# Altium PCB PCB1.PcbDoc
Units mil, origin at the board's own origin, x right, y up, seen from the top; angles counter-clockwise.
Board outline 5050 x 1500 mil, 2 copper layers (Top Layer, Bottom Layer); 39 components, 29 nets, 96 pads, 0 vias.
Unrouted connection lines stored in the file: 44.
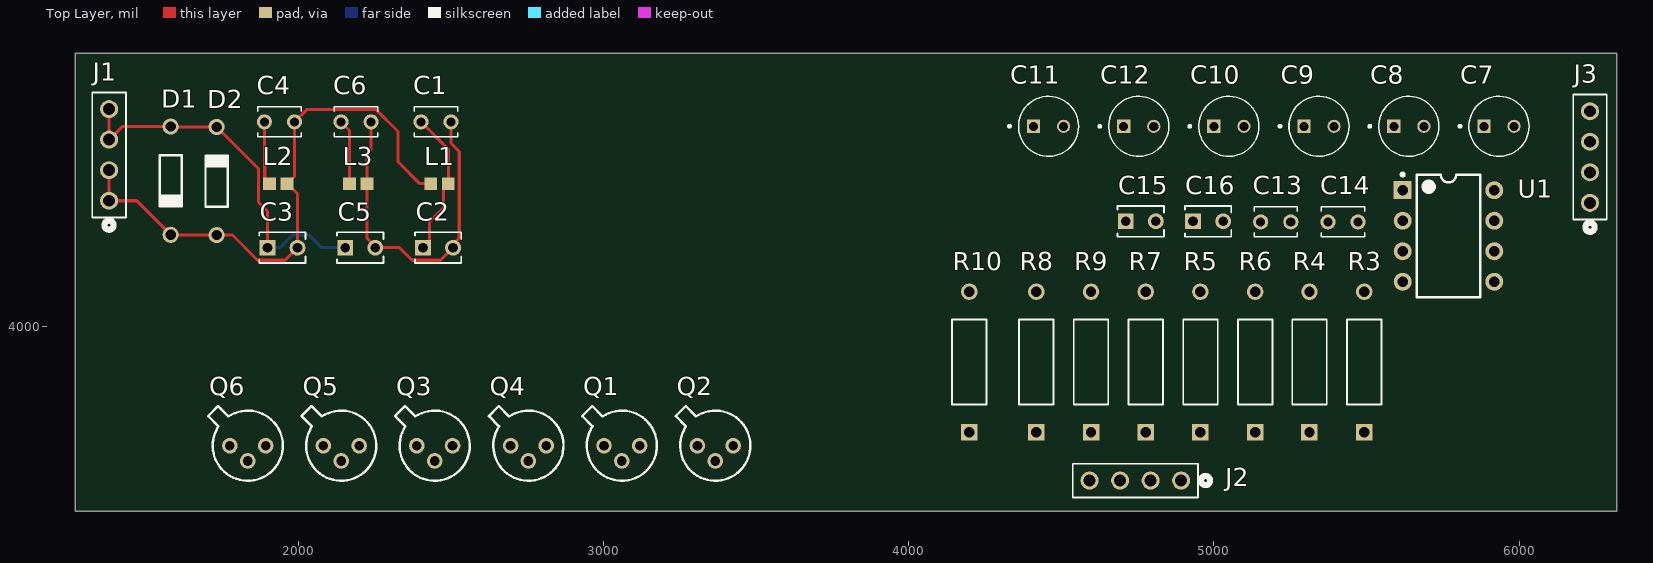
[diagram p0: Top Layer view]
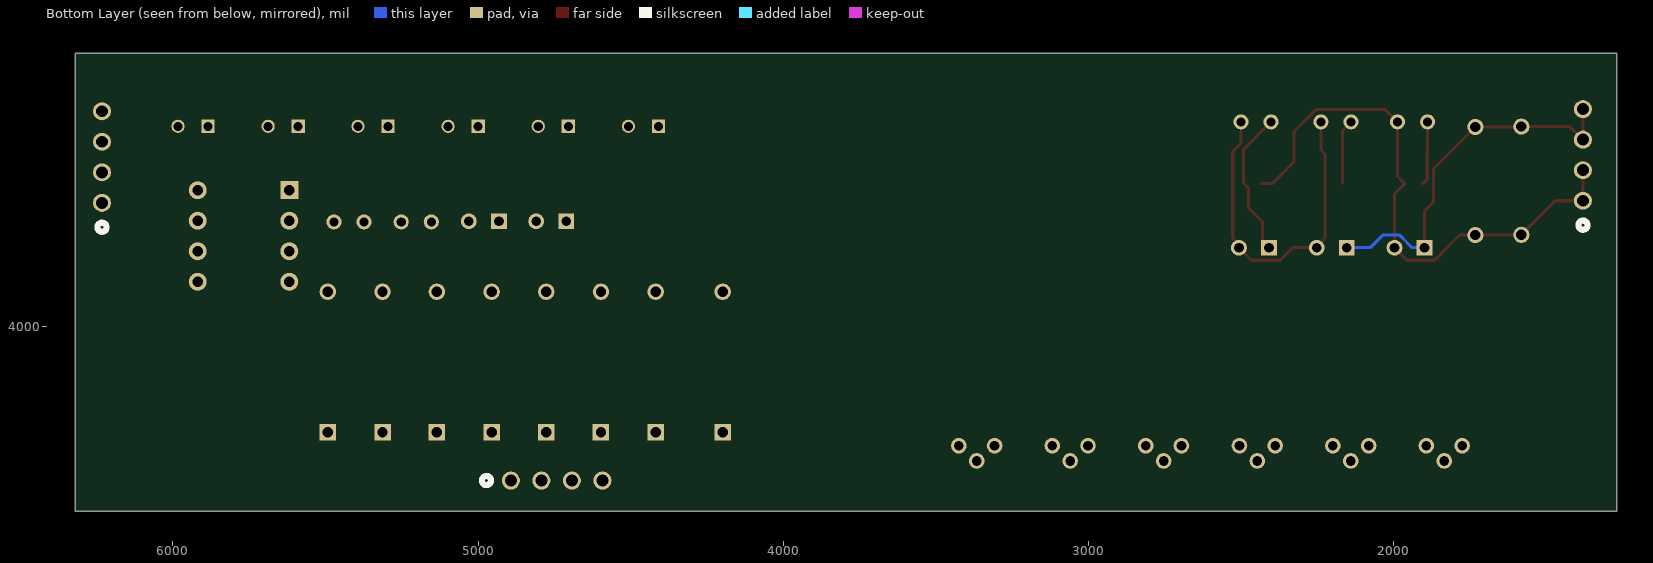
[diagram p1: Bottom Layer view, seen from below]

## Layer stack, top to bottom
Top Solder: solder mask 0.4, Solder Resist, Dk 3.5
Top Layer: signal copper 1.4
Dielectric 1: dielectric 12.6, FR-4, Dk 4.8
Bottom Layer: signal copper 1.4
Bottom Solder: solder mask 0.4, Solder Resist, Dk 3.5

## Board outline
1270,3395 1270,4895 6320,4895 6320,3395

## Design rules (kind name [scope] priority, off if disabled: settings)
Clearance [All] p1: gap=10 ignorepadtopadclearanceinfootprint=FALSE
PolygonConnect [All] p1: connectstyle=Relief reliefconductorwidth=10 reliefentries=4 polygonreliefangle="90 Angle" airgapwidth=10
RoutingVias [All] p1: holewidth=28 width=50 viastyle="Through Hole" minholewidth=28 minwidth=50 maxholewidth=28 maxwidth=50
SolderMaskExpansion [All] p1: expansion=4 istentingtop=FALSE
SupplyNets "Schematic Supply Nets" [InNet('GND')] p1: voltage=0.000
Width [All] p1: maxlimit=10 minlimit=10 preferedwidth=10
30 further rules are at their usual default settings.

## Classes and differential pairs
component class mahirAMPLIFER: C7 C8 C9 C10 C11 C12 C13 C14 C15 C16 J3 R3 R4 R5 R6 R7 R8 R9 R10 R22 R23 R24 R25 R26 R27 R28 R29 Rg1 Rg2 Rg3 Rg4 Rs1 Rs2 U1

## Components (designator, comment, footprint, x,y, rotation, side; value= is the part's Value field where it differs from the comment)
C1 "RCER71H104K0A2H03B" CAP_RCER71H104K0A2H03B 2451.77,4670.28 r0 top
C2 "K103K10X7RF53L2" K103K10X7RF53L2_VIS 2409.45,4257.87 r0 top
C3 "K103K10X7RF53L2" K103K10X7RF53L2_VIS 1899.61,4257.87 r0 top
C4 "RCER71H104K0A2H03B" CAP_RCER71H104K0A2H03B 1938.98,4670.28 r180 top
C5 "K103K10X7RF53L2" K103K10X7RF53L2_VIS 2154.53,4257.87 r0 top
C6 "RCER71H104K0A2H03B" CAP_RCER71H104K0A2H03B 2189.96,4670.28 r180 top
C7 "ECA1CM100I" CAPPRD250W50D500H1100 5934.13,4655.51 r0 top
C8 "ECA1CM100I" CAPPRD250W50D500H1100 5638.84,4655.51 r0 top
C9 "ECA1CM100I" CAPPRD250W50D500H1100 5344.53,4655.51 r0 top
C10 "ECA1CM100I" CAPPRD250W50D500H1100 5049.24,4655.51 r0 top
C11 "ECA1CM100I" CAPPRD250W50D500H1100 4458.66,4655.51 r0 top
C12 "ECA1CM100I" CAPPRD250W50D500H1100 4753.95,4655.51 r0 top
C13 "RCER71H104K0A2H03B" CAP_RCER71H104K0A2H03B 5202.78,4342.52 r0 top
C14 "RCER71H104K0A2H03B" CAP_RCER71H104K0A2H03B 5423.26,4342.52 r0 top
C15 "K103K10X7RF53L2" K103K10X7RF53L2_VIS 4711.61,4344.49 r0 top
C16 "K103K10X7RF53L2" K103K10X7RF53L2_VIS 4932.1,4344.49 r0 top
D1 "1N4148" NXP-SOD27-2_V 1582.68,4477.36 r270 top
D2 "1N4148" NXP-SOD27-2_V 1733.27,4476.38 r90 top
J1 "PRPC004SAAN-RC" CONN4_PRPC004_SUL 1380.91,4411.81 r270 top
J2 "PRPC004SAAN-RC" CONN4_PRPC004_SUL 4892.91,3495.08 r0 top
J3 "PRPC004SAAN-RC" CONN4_PRPC004_SUL 6232.28,4404.92 r270 top
L1 "BRC1608TR50M6" INDC1608X100N 2463.58,4467.52 r0 top
L2 "BRC1608TR50M6" INDC1608X100N 1935.35,4467.52 r0 top
L3 "BRC1608TR50M6" INDC1608X100N 2196.97,4467.52 r0 top
Q1 "2N2222" MLTC-TO-18-3 3060.69,3609.25 r0 top
Q2 "2N2222" MLTC-TO-18-3 3366.81,3609.25 r0 top
Q3 "2N2222" MLTC-TO-18-3 2447.47,3609.25 r0 top
Q4 "2N2222" MLTC-TO-18-3 2754.57,3609.25 r0 top
Q5 "2N2222" MLTC-TO-18-3 2141.35,3609.25 r0 top
Q6 "2N2222" MLTC-TO-18-3 1835.24,3609.25 r0 top
R3 "MFP-25BRD52-100K" YAG_MF25_YAG 5492.5,3653.71 r90 top
R4 "MFP-25BRD52-100K" YAG_MF25_YAG 5313.36,3653.71 r90 top
R5 "MFP-25BRD52-100K" YAG_MF25_YAG 4956.06,3653.71 r90 top
R6 "MFP-25BRD52-100K" YAG_MF25_YAG 5135.2,3653.71 r90 top
R7 "MFP-25BRD52-100K" YAG_MF25_YAG 4776.92,3653.71 r90 top
R8 "MFP-25BRD52-100K" YAG_MF25_YAG 4418.63,3653.71 r90 top
R9 "MFP-25BRD52-100K" YAG_MF25_YAG 4597.77,3653.71 r90 top
R10 "MFP-25BRD52-100K" YAG_MF25_YAG 4199.13,3653.71 r90 top
U1 "LT1638CN8#PBF" LT-N8-8 5768.7,4296.26 r0 top

## Footprints (in the part's own frame and the unit in brackets; to place one, negate y for a bottom-side part, rotate by r counter-clockwise, add the part's x,y. Pads: shape width x height; smd on the part's side, far side on the other; paste and mask are expansions set on the pad)
CAP_RCER71H104K0A2H03B [mm]
  round 1.258 hole 0.75: 1(-1.25,0) 2(1.25,0)
  silkscreen extent -1.8,-1.25 1.8,1.25
CAPPRD250W50D500H1100 [mm]
  round 1.1 hole 0.75: N(1.25,0)
  rect 1.1x1.1 hole 0.75: P(-1.25,0)
  silkscreen extent -3.35,-2.5 2.5,2.5, body extent -2.5,-2.5 2.5,2.5, height 11
CONN4_PRPC004_SUL [mil]
  round 59 / inner round 60 / far side round 59 hole 39 paste-99999 mask+0: 1(0,0) 2(-100,0) 3(-200,0) 4(-300,0)
  silkscreen extent -355,-55 95,55
INDC1608X100N [mm]
  rect 1.06x1.02 smd: 1(-0.728,0) 2(0.728,0)
K103K10X7RF53L2_VIS [mil]
  rect 52x52 / inner round 60 / far side rect 52x52 hole 32 paste-99999 mask+0: 1(0,0)
  round 52 / inner round 60 / far side round 52 hole 32 paste-99999 mask+0: 2(98.43,0)
  silkscreen extent -27,-50 125,50, body extent -33,-46 109,46, height 142
LT-N8-8 [mm] "DIP, 8-Leads, Body 10.16x6.48mm, Pitch 2.54mm"
  rect 1.5x1.5 hole 0.9: 1(-3.81,3.81)
  round 1.5 hole 0.9: 2(-3.81,1.27) 3(-3.81,-1.27) 4(-3.81,-3.81) 5(3.81,-3.81) 6(3.81,-1.27) 7(3.81,1.27) 8(3.81,3.81)
  silkscreen extent -3.93,-5.1 2.65,5.23, body extent -3.95,-5.07 3.95,5.07, height 3.94
MLTC-TO-18-3 [mm] "TO-18, 3-Leads"
  round 1.3 hole 0.8: 1(-1.485,0) 2(0,-1.27) 3(1.485,0)
  silkscreen extent -3.29,-2.92 2.92,3.29, body extent -3.29,-2.93 2.93,3.29, height 5.33
NXP-SOD27-2_V [mm] "SOD27, 2-Leads, Dia 1.85mm, Body Length 4.25mm, Pin Spacing 9mm"
  round 1.35 hole 0.85: 1(-4.5,0) 2(4.5,0)
  silkscreen extent -2.12,-0.93 2.12,0.92, body extent -4.78,-0.92 4.78,0.92, height 1.84
YAG_MF25_YAG [mil]
  rect 54x54 / inner round 60 / far side rect 54x54 hole 34 paste-99999 mask+0: 1(0,0)
  round 54 / inner round 60 / far side round 54 hole 34 paste-99999 mask+0: 2(460,0)
  silkscreen extent 91,-56 369,57, body extent -12,-51 472,51, height 103

## Part data
C1 C4 C6 C13 C14: "Cap Ceramic 1pF 50V C0G 0.25pF Radial 2.5mm 125C Automotive Bulk", Package=None, Availability=Unavailable, MP=RCER71H104K0A2H03B, Price=None
C2 C3 C5 C15 C16: "No Description Available", Mfr_Name=Vishay, Type="Ceramic Capacitor"
C7 C8 C9 C10 C11 C12: "10ÂµF 16V Aluminum Electrolytic Capacitors Radial, Can 2000 Hrs @ 85Â°C", Package="RADIAL-2 Panasonic", Check_prices=https://www.snapeda.com/parts/ECA1CM100I/Panasonic/view-part/?ref=eda, Digi-Key_Part_Number=P19513TB-ND, MF=Panasonic, MP=ECA1CM100I, SnapEDA_Link=https://www.snapeda.com/parts/ECA1CM100I/Panasonic/view-part/?ref=snap
D1 D2: library part CMP-0648-00002-1, "High-speed Diode, 100 V, 450 mA, 2-Pin SOD27, RoHS", Manufacturer="NXP Semiconductors", Cd="4 pF Max.", ComponentLink1Description="Manufacturer URL", ComponentLink1URL=http://www.nxp.com/, ComponentLink2Description=Datasheet, ComponentLink2URL=http://www.nxp.com/documents/data_sheet/1N4148_1N4448.pdf, ComponentLink3Description="Package Specification", ComponentLink3URL=http://www.nxp.com/documents/data_sheet/1N4148_1N4448.pdf, Configuration=Single, DatasheetVersion=Aug-04, IF="200 mA Max.", IFRM="450 mA", IFSM="4 A Max.", IR (VR="20 V)=25 nA", Mounting Technology="Through Hole", PackageDescription="2-Pin Hermetically Sealed Glass Package, Axial Leaded, Dia 1.85 mm, Body Length 4.25 mm, Lead Spread 25.4 mm", PackageReference=SOD27, PackageVersion=Aug-04, PartNumber=1N4148, RoHS=TRUE, Trr="4 ns Max.", VF (IF="10 mA)=1 V", VR="100 V Max."
J1 J2 J3: "No Description Available", Mfr_Name=Sullins, RefDes=RefDes, Type="Headers, Male Pins"
L1 L2 L3: "Inductor Power Chip Wirewound 500nH 20% 6MHz Ferrite 1.05A 117mOhm DCR 0603 T/R", Package=None, Availability=Unavailable, MP=BRC1608TR50M6, Price=None
Q1 Q2 Q3 Q4 Q5 Q6: library part CMP-2000-05237-1, "Low Power Bipolar NPN Transistor, 30 V, -65 to 200 degC, 3-Pin TO-18, RoHS, Bulk", Collector Emitter Voltage V(br)ceo=30V, Collector Emitter Voltage Vces=400mV, Continuous Collector Current Ic Max=800mA, Current Ic @ Vce Sat=150mA, DC Current Gain hFE=100, Full Power Rating Temperature=25degC, Manufacturer=Multicomp, Package / Case=TO-18, Package Description="3-Pin Transistor Outline Package (TO-18), Dia 5.54 mm, Pitch Pitch 1.485mm", Package Reference=TO-18-3, Power Dissipation Pd=500mW, Voltage Vcbo=60V, Current Ic Continuous a Max=800mA, Current Ic hFE=150mA, Datasheet URL=http://www.farnell.com/datasheets/1662272.pdf, Datasheet Version="Rev. 1.1, 05/2012", DC Collector Current=800mA, Gain Bandwidth ft Min=250MHz, Gain Bandwidth ft Typ=250MHz, Hfe Min=100, Manufacturer URL=http://uk.farnell.com/b/multicomp, No. of Pins=3, No. of Transistors=1, Pin Configuration=a, Power Dissipation Ptot Max=500mW, SVHC=NoSVHC(19-Dec-2012), Transistor Case Style=TO-18, Transistor Polarity=NPN
R3 R4 R5 R6 R7 R8 R9 R10: "No Description Available", Mfr_Name=Yageo
U1: library part CMP-0359-01111-2, "Dual Channel, High Voltage, Micropower Rail-to-Rail Operational Amplifier, 1.2 MHz Typical GBW, 0.38 V/us Typical SR, 2.2 to 44 V, 8-Pin DIP (N8-8), Commercial, Pb-Free", Linear Technology Part Number=LT1638, Manufacturer="Linear Technology", Channels (#)=2, ComponentLink1Description="Manufacturer URL", ComponentLink1URL=http://www.linear.com/, ComponentLink2Description=Datasheet, ComponentLink2URL=http://cds.linear.com/docs/en/datasheet/16389fg.pdf, ComponentLink3Description="Package Specification", ComponentLink3URL=http://cds.linear.com/docs/en/packaging/05081510_I_N8.pdf, DatasheetVersion="Rev. G", GBW (MHz) Typical=1.2, Is (mA) Typical=0.17, Mounting Technology="Surface Mount", PackageDescription="8-Lead PDIP, Body 10.16 x 6.48 mm, Pitch 2.54 mm", PackageReference=LT-N8-8, PackageVersion="Rev I", PartNumber=LT1638CN8#PBF, RevisionNote="URLs updated", RoHS=Pb-Free, SR (V/us) Typical=0.38, Type=VFB, Vos (mV) Guaranteed=0.6, Vos (mV) Typical=0.2, Vs Max (V)=44, Vs Min (V)=2.2

## Nets (pads, with @x,y where several pads share a name; then routed paths per layer and width w, separated by ;. In a path a pad name is that pad's centre, name@x,y a point inside that pad or via, vN(x,y) a via of type N, cw(c..) or ccw(c..) an arc to the next point about the centre after c; other vN are vias at no path point)
5V: J3.2 R3.2 R5.2 R6.2 R7.2 U1.8
GND: C3.1 C5.1 C7.N C9.N C13.2 C14.2 C15.2 C16.2 D1.1 D2.2 J1.3 J1.4 J3.4 R4.1 R8.1 R9.1 R10.1 U1.4 | length 1224.2
  Top Layer w10: J1.4 J1.3 1423.62,4654.53 D1.1 1583.17,4654.04 1732.78,4654.04 D2.2 1870.83,4515.99 1870.83,4405.98 1899.61,4377.2 C3.1
  Bottom Layer w10: C3.1 1940.61,4257.87 1957.03,4274.3 1957.03,4274.86 1981.05,4298.87 2036.79,4298.87 2077.79,4257.87 C5.1
I_Signal: C8.N J3.1
IF1_Signal: Q3.3 Q4.3
IF2_Signal: Q1.3 Q2.3
LimitertoBandpass: C3.2 C4.1 D1.2 D2.1 J1.1 J1.2 L1.1 L2.2 | length 1873.2
  Top Layer w10: J1.2 J1.1 1471.06,4411.81 D1.2 1583.17,4299.7 1732.78,4299.7 D2.1 1785.05,4299.21 1867.39,4216.87 1957.03,4216.87 C3.2 1998.03,4434.29 L2.2@1964.8,4467.52 ; L2.2 L2.2@1964.8,4467.52 ; L1.1 2399.06,4467.52 2327.35,4539.23 2327.35,4638.33 2255.64,4710.04 2027.95,4710.04 C4.1 1988.19,4490.91 L2.2@1964.8,4467.52
LimitertoGilbert: C1.2 C2.2 C5.2 C6.1 L3.2 | length 1150.2
  Top Layer w10: C6.1 2239.17,4577.86 2225.63,4564.32 L3.2 2225.63,4288.53 2252.95,4261.21 C5.2 2332.49,4257.87 2373.49,4216.87 2466.87,4216.87 C2.2 2507.87,4269.24 2528.11,4289.48 2528.11,4573.01 2500.98,4600.13 C1.2
Low_Pass_0Deg: C11.N R5.1 R8.2 U1.3
Low_Pass_90Deg: C12.N R6.1 R9.2 U1.5
MixertoAmplifer_I: C11.P C13.1 C15.1
MixertoAmplifer_Q: C12.P C14.1 C16.1
NetC1_1: C1.1 C2.1 L1.2 | length 495.1
  Top Layer w10: C2.1@2398.62,4257.87 C2.1 2430.45,4278.87 2430.45,4342.69 2476.38,4388.62 2476.38,4452.44 2491.46,4467.52 L1.2 2492.24,4580.59 C1.1
NetC4_2: C4.2 L2.1 | length 210.2
  Top Layer w10: C4.2 1889.76,4567.84 1890.83,4566.78 1890.83,4482.6 1905.9,4467.52 L2.1
NetC6_2: C6.2 L3.1 | length 214.2
  Top Layer w10: C6.2 2140.75,4669.16 2168.31,4641.6 L3.1
NetC7_P: C7.P R3.1 R4.2
NetC8_P: C8.P U1.1
NetC9_P: C9.P R7.1 R10.2
NetC10_P: C10.P U1.7
NetI1_1: Q5.1 Q6.1
NetLO_signal1_1: Q2.2 Q3.2
NetLO_signal1_2: Q1.2 Q4.2
NetQ1_1: Q1.1 Q3.1 Q6.3
NetQ2_1: Q2.1 Q4.1 Q5.3
NetQ5_2: Q5.2
NetQ6_2: Q6.2
NetR1_2: 
NetRg1_1: U1.2
NetRg3_1: U1.6
Q_Signal: C10.N J3.3
pads on no net: J2.1 J2.2 J2.3 J2.4

## Silkscreen, mask and mechanical layers (free items; w line width, h text height)
Mechanical 1:
  the board outline again, w10